# Altium PCB PCB1.PcbDoc
Units mil, origin at the board's own origin, x right, y up, seen from the top; angles counter-clockwise.
Board outline 6000 x 4000 mil, 2 copper layers (Top Layer, Bottom Layer); 43 components, 58 nets, 217 pads, 5 vias.
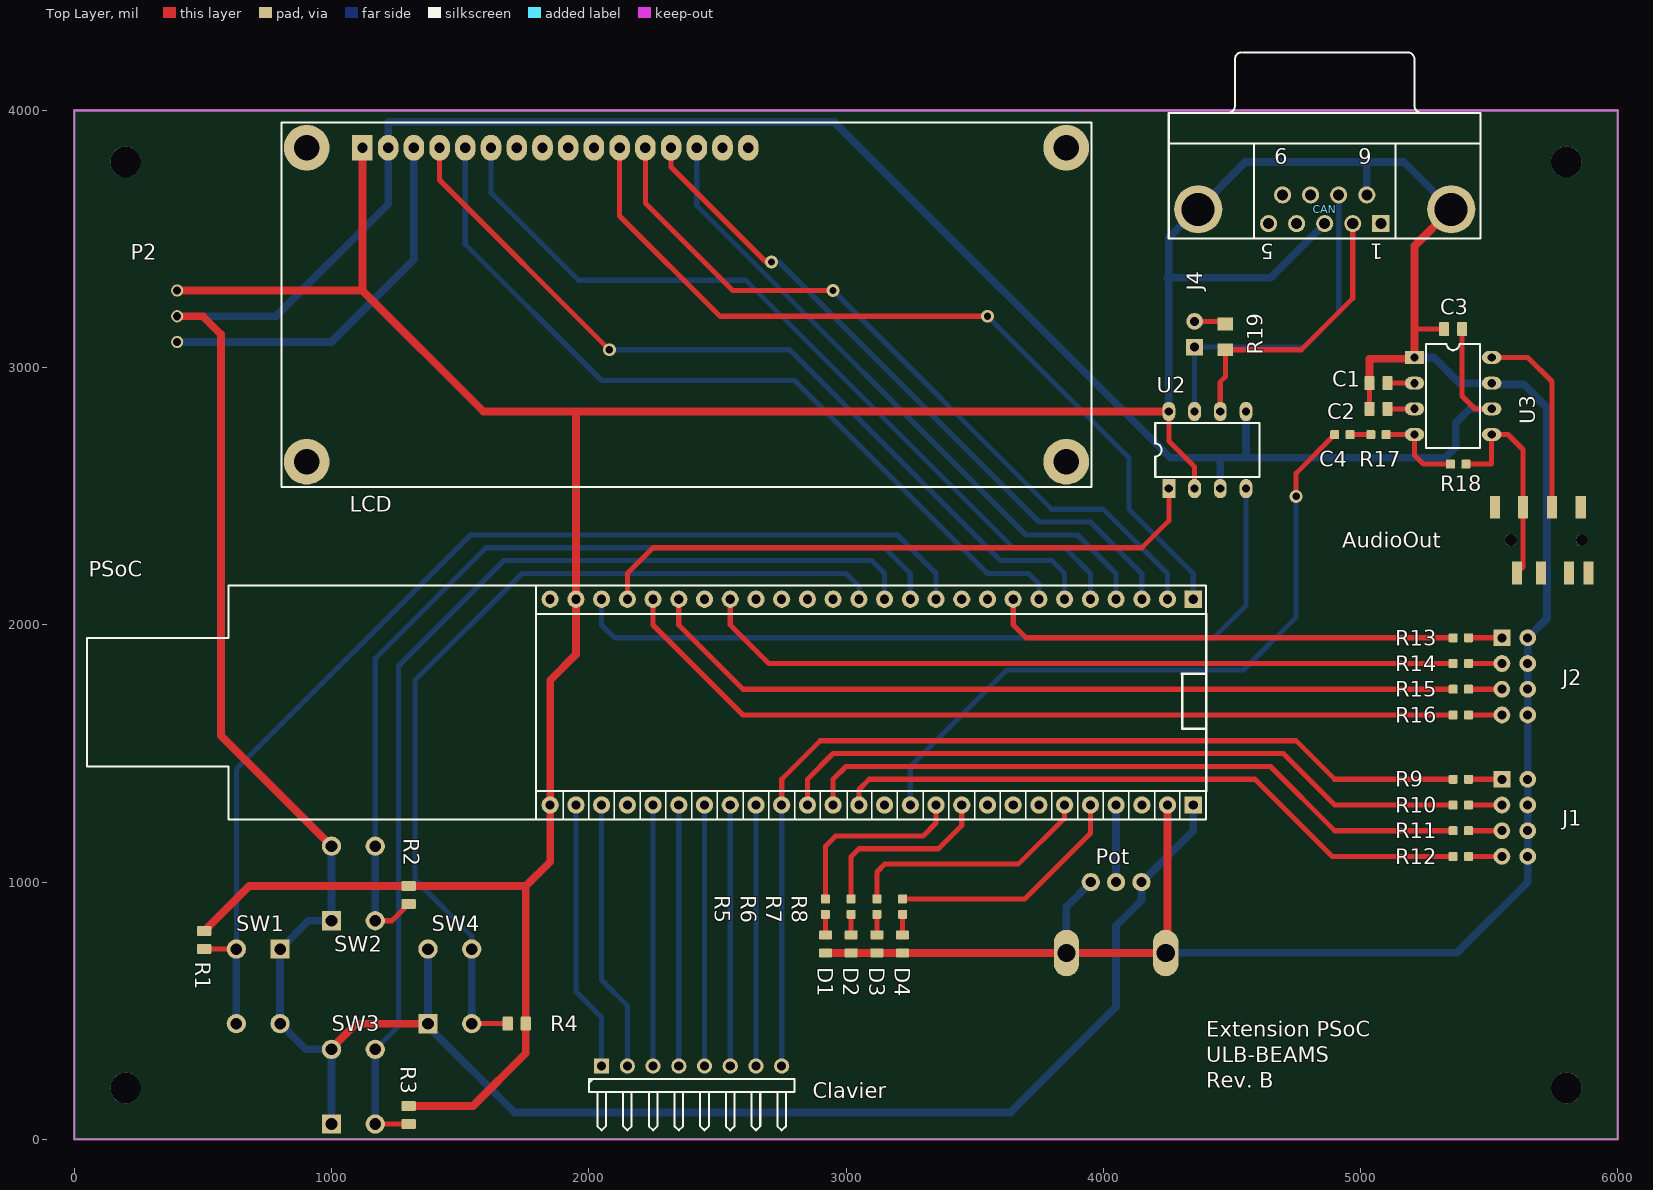
[diagram p0: Top Layer view]
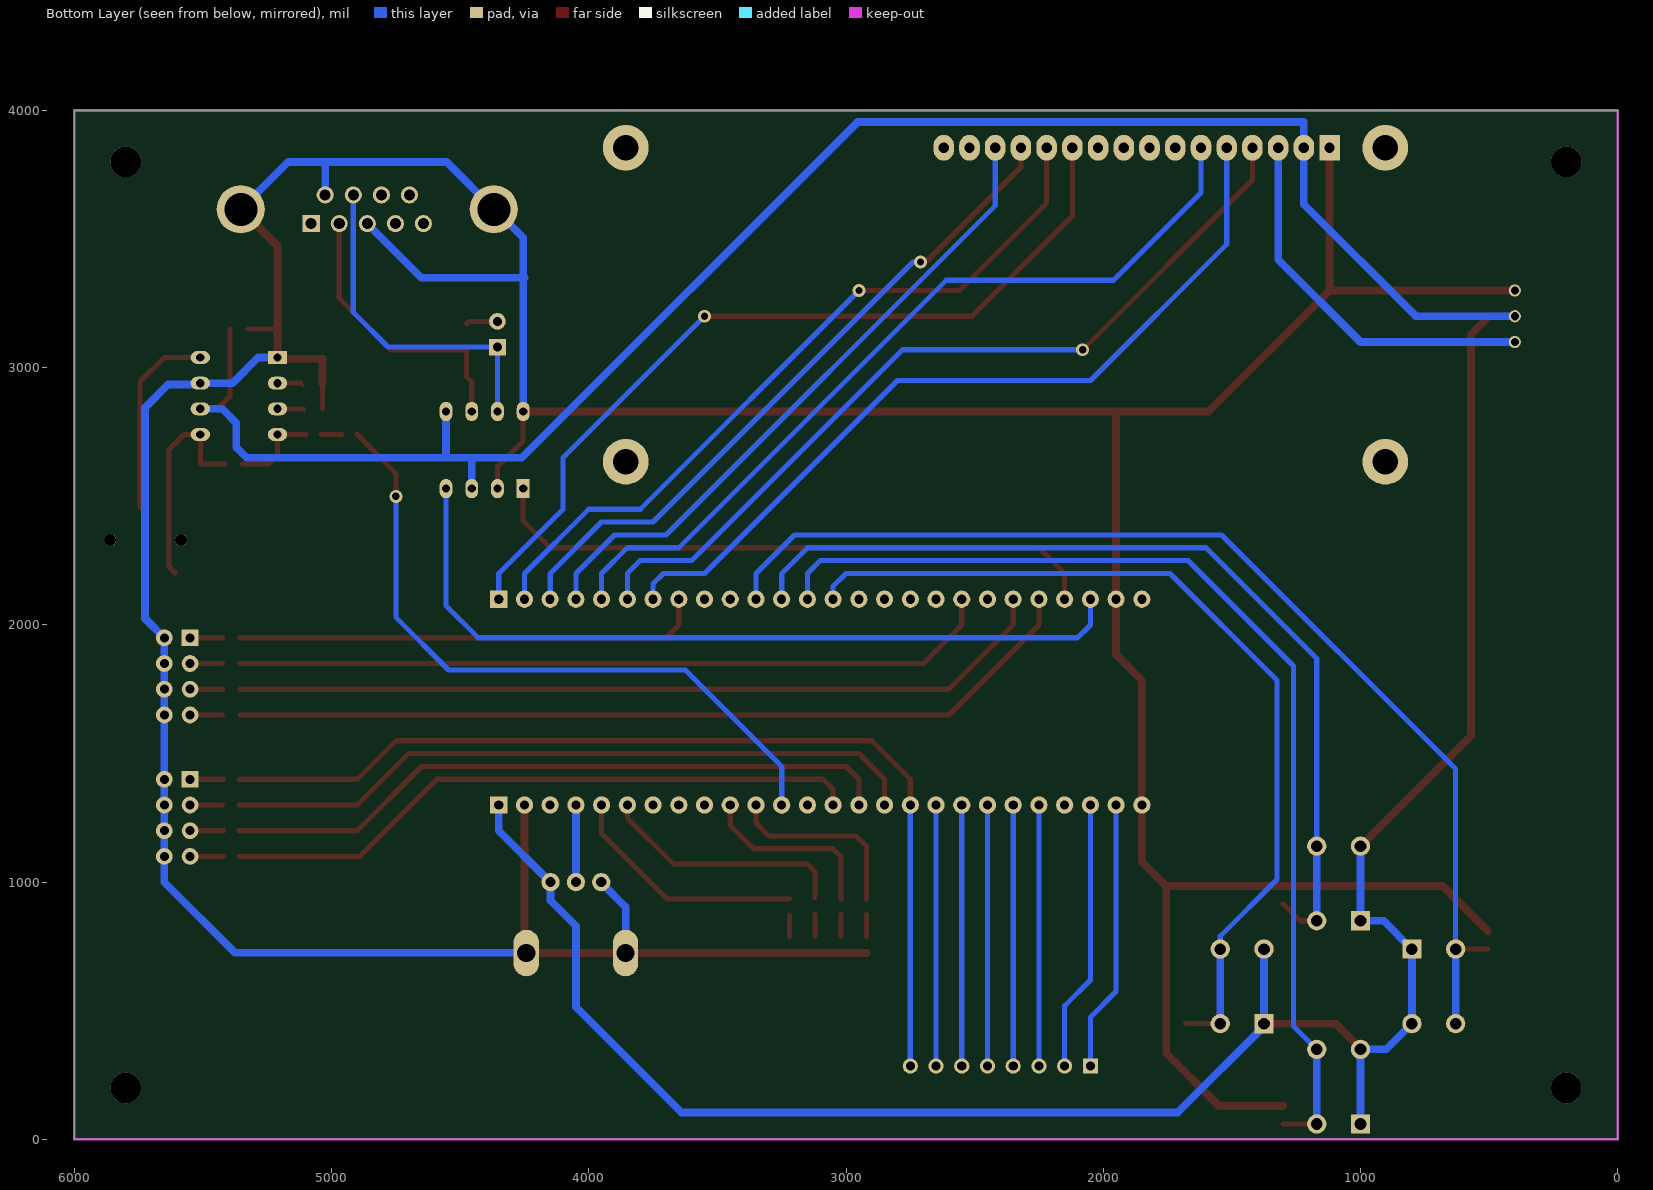
[diagram p1: Bottom Layer view, seen from below]

## Layer stack, top to bottom
Top Solder: solder mask 0.4, Solder Resist, Dk 3.5
Top Layer: signal copper 1.4
Dielectric 1: dielectric 12.6, FR-4, Dk 4.8
Bottom Layer: signal copper 1.4
Bottom Solder: solder mask 0.4, Solder Resist, Dk 3.5

## Board outline
0,0 6000,0 6000,4000 0,4000

## Design rules (kind name [scope] priority, off if disabled: settings)
Clearance [All] p1: gap=10 ignorepadtopadclearanceinfootprint=FALSE except(0: Arc-Hole Track-Hole SMDPad-Hole THPad-Hole Via-Hole Fill-Hole Poly-Hole Region-Hole Text-Hole)
HoleSize [All] p1: absolutevalues=TRUE maxlimit=130 minlimit=1 maxpercent=80.000 minpercent=20.000
PolygonConnect [All] p1: connectstyle=Relief reliefconductorwidth=10 reliefentries=4 polygonreliefangle="90 Angle" airgapwidth=10
RoutingVias [All] p1: holewidth=28 width=50 viastyle="Through Hole" minholewidth=28 minwidth=50 maxholewidth=28 maxwidth=50
SilkToSolderMaskClearance [IsPad] p1: minsilkscreentomaskgap=4 clearancetoexposedcopper=TRUE
SolderMaskExpansion [All] p1: expansion=0
Width [All] p1: maxlimit=100 minlimit=10 preferedwidth=20
28 further rules are at their usual default settings.

## Classes and differential pairs
component class Sheet1: D1 D2 D3 D4 J1 J2 Pot Potentiometer PSoC R1 R2 R3 R4 R5 R6 R7 R8 R9 R10 R11 R12 R13 R14 R15 R16 SW1 SW2 SW3 SW4
component class Sheet2: AudioOut C1 C2 C3 C4 CAN Clavier J3 J4 LCD P2 R17 R18 R19 U2 U3

## Components (designator, comment, footprint, x,y, rotation, side; value= is the part's Value field where it differs from the comment)
AudioOut "320040003" AUDIO8P-SMD-3.5-14.5X6X5MM 6006.26,2330 r180 top
C1 "302010179" C0805 5070,2940 r90 top value=1uF
C2 "302010179" C0805 5070,2840 r90 top value=1uF
C3 "302010179" C0805 5360,3150 r90 top value=1uF
C4 "302010138" C0603 4930,2740 r90 top value=100nF
CAN "LD09P33E4GV00LF" DSUB1.385-2H9B 4860.94,3871.81 r180 top
Clavier "22-05-2081" HDR1X8H 2050,285 r0 top
D1 "304090039" LED-0805 2920,760 r270 top
D2 "304090039" LED-0805 3020,760 r270 top
D3 "304090039" LED-0805 3120,760 r270 top
D4 "304090039" LED-0805 3220,760 r270 top
J1 "320030087" H2X4-2.54 5600,1250 r0 top
J2 "320030087" H2X4-2.54 5600,1800 r0 top
J4 "320190003" H2-2.54 4355,3130 r180 top
LCD "161A-BA-BC" PC161A 1120,3855 r0 top
P2 "301040007" ADJR3-9.5X9.5X10.5MM 400,3200 r270 top
Pot "301040022" ADJR2+3P-11.0X9.8X12.0MM 4050,1000 r270 top
PSoC "CY8CKIT_059" CY8CKIT-059 4350,2100 r270 top
R1 "301010361" R0805 505,775 r0 top value=10k
R2 "301010361" R0805 1300,950 r0 top value=10k
R3 "301010361" R0805 1300,95 r0 top value=10k
R4 "301010361" R0805 1720,450 r270 top value=10k
R5 "301010298" R0603 2920,905 r180 top value=1k
R6 "301010298" R0603 3020,905 r180 top value=1k
R7 "301010298" R0603 3120,905 r180 top value=1k
R8 "301010298" R0603 3220,905 r180 top value=1k
R9 "301010298" R0603 5390,1400 r270 top value=1k
R10 "301010298" R0603 5390,1300 r270 top value=1k
R11 "301010298" R0603 5390,1200 r270 top value=1k
R12 "301010298" R0603 5390,1100 r270 top value=1k
R13 "301010298" R0603 5390,1950 r270 top value=1k
R14 "301010298" R0603 5390,1850 r270 top value=1k
R15 "301010298" R0603 5390,1750 r270 top value=1k
R16 "301010298" R0603 5390,1650 r270 top value=1k
R17 "301010132" R0603 5070,2740 r90 top value=22k
R18 "301010298" R0603 5380,2625 r90 top value=1k
R19 "301010412" R1206 4475,3120 r90 top value=100
SW1 "311020024" SW4-6.0X6.0X5.0MM 715,595 r270 top
SW2 "311020024" SW4-6.0X6.0X5.0MM 1085,995 r90 top
SW3 "311020024" SW4-6.0X6.0X5.0MM 1085,205 r90 top
SW4 "311020024" SW4-6.0X6.0X5.0MM 1460,595 r90 top
U2 "MCP2562-I/P" DIP8 4405,2680 r0 top
U3 "NJM2113D" DIP8 5360,2890 r270 top

## Footprints (in the part's own frame and the unit in brackets; to place one, negate y for a bottom-side part, rotate by r counter-clockwise, add the part's x,y. Pads: shape width x height; smd on the part's side, far side on the other; paste and mask are expansions set on the pad)
ADJR2+3P-11.0X9.8X12.0MM [mm]
  round 1.8 hole 1: 1(0,2.5) 2(0,0) 3(0,-2.5)
  oval 4.6x2.5 hole 1.8: P1(7,4.9) P2(7,-4.9)
ADJR3-9.5X9.5X10.5MM [mil]
  round 47.25 hole 31.5: 1(-100,0) 2(0,0) 3(100,0)
AUDIO8P-SMD-3.5-14.5X6X5MM [mm]
  round 1.2 hole 1.2: 1(3.7,0) 1(10.7,0)
  rect 1x2.25 smd: 1(3.81,-3.24) 2(6.66,-3.24) 3(9.51,-3.24) 4(10.1,3.24) 5(3.05,3.24) 6(4.95,3.24) 7(7.75,3.24) 8(12.26,-3.24)
C0603 [mil]
  rrect25% 35x35 smd: 1(0,30) 2(0,-30)
C0805 [mil]
  rrect25% 55x40 smd: 1(0,35) 2(0,-35)
CY8CKIT-059 [mm] "CYPRESS PSOC5 module"
  rect 1.7x1.7 hole 0.9: 1(0,0) 52(20.32,0)
  round 1.7 hole 0.9: 2(0,-2.54) 3(0,-5.08) 4(0,-7.62) 5(0,-10.16) 6(0,-12.7) 7(0,-15.24) 8(0,-17.78) 9(0,-20.32) 10(0,-22.86) 11(0,-25.4) 12(0,-27.94) 13(0,-30.48) 14(0,-33.02) 15(0,-35.56) 16(0,-38.1) 17(0,-40.64) 18(0,-43.18) 19(0,-45.72) 20(0,-48.26) 21(0,-50.8) 22(0,-53.34) 23(0,-55.88) 24(0,-58.42) 25(0,-60.96) 26(0,-63.5) 27(20.32,-63.5) 28(20.32,-60.96) 29(20.32,-58.42) 30(20.32,-55.88) 31(20.32,-53.34) 32(20.32,-50.8) 33(20.32,-48.26) 34(20.32,-45.72) 35(20.32,-43.18) 36(20.32,-40.64) 37(20.32,-38.1) 38(20.32,-35.56) 39(20.32,-33.02) 40(20.32,-30.48) 41(20.32,-27.94) 42(20.32,-25.4) 43(20.32,-22.86) 44(20.32,-20.32) 45(20.32,-17.78) 46(20.32,-15.24) 47(20.32,-12.7) 48(20.32,-10.16) 49(20.32,-7.62) 50(20.32,-5.08) 51(20.32,-2.54)
  silkscreen extent -1.37,-109.22 21.77,1.27, body extent 19.05,-64.9 21.59,1.27, height 8.38
DIP8 [mil] "DIP, Plastic; 8 Leads; Row Spacing 7.62 mm; Pitch 2.54 mm"
  rect 50x75 hole 32: 1(-150,-150)
  oval 50x75 hole 32: 2(-50,-150) 3(50,-150) 4(150,-150) 5(150,150) 6(50,150) 7(-50,150) 8(-150,150)
  silkscreen extent -203,-104 203,104
DSUB1.385-2H9B [mm] "Connector; D Subminiature AMPLIMITE 2000; 9 Position; Right Angle"
  rect 1.69x1.69 hole 1.09: 1(-5.54,7.92)
  round 1.69 hole 1.09: 2(-2.77,7.92) 3(0,7.92) 4(2.77,7.92) 5(5.54,7.92) 6(-4.155,5.08) 7(-1.385,5.08) 8(1.385,5.08) 9(4.155,5.08)
  round 4.76 hole 3.26: 10(12.495,6.5) 11(-12.495,6.5)
  silkscreen extent -15.4,-9 15.4,9.4, body extent -15.4,-9 15.4,9.4, height 12.93
H2-2.54 [mil]
  rect 65x65 hole 35: 1(0,50)
  round 65 hole 35: 2(0,-50)
H2X4-2.54 [mil]
  rect 65x65 hole 35: 1(-50,150)
  round 65 hole 35: 2(-50,50) 3(-50,-50) 4(-50,-150) 5(50,-150) 6(50,-50) 7(50,50) 8(50,150)
HDR1X8H [mm] "Connector; Header; 8 Position; Right Angle"
  rect 1.5x1.5 hole 0.9: 1(0,0)
  round 1.5 hole 0.9: 2(2.54,0) 3(5.08,0) 4(7.62,0) 5(10.16,0) 6(12.7,0) 7(15.24,0) 8(17.78,0)
  silkscreen extent -1.27,-6.35 19.05,-1.27
LED-0805 [mil]
  rrect25% 35x50 smd: +(-35,0) -(35,0)
PC161A [mil] "16x1 LCD module"
  round 177.17 hole 98.43: 0(-216.54,-1220.47) 0(-216.54,0) 0(2736.22,-1220.47) 0(2736.22,0)
  rect 80x100 hole 40: 1(0,0)
  oval 80x100 hole 40: 2(100,0) 3(200,0) 4(300,0) 5(400,0) 6(500,0) 7(600,0) 8(700,0) 9(800,0) 10(900,0) 11(1000,0) 12(1100,0) 13(1200,0) 14(1300,0) 15(1400,0) 16(1500,0)
  silkscreen extent -315,-1319 2835,98
R0603 [mil]
  rrect25% 35x35 smd: 1(0,30) 2(0,-30)
R0805 [mil]
  rrect25% 55x40 smd: 1(0,35) 2(0,-35)
R1206 [mil]
  rect 50x60 smd: 1(-50,0) 2(50,0)
SW4-6.0X6.0X5.0MM [mil]
  rect 75x75 hole 45: 1(-145,85)
  round 75 hole 45: 2(-145,-85) 3(145,-85) 4(145,85)

## Part data
AudioOut: library part AUDIO-JACK-SMD-8P(PJ-3536-L6S), MPN=PJ-3536-L6S
C1 C2 C3: library part CERAMIC-1UF-25V-10%-X7R(0805), MPN=CC0805KKX7R8BB105
C4: library part CERAMIC-100NF-50V-10%-X7R(0603), MPN=CC0603KRX7R9BB104
CAN: library part "D Connector 9", "Receptacle Assembly, 9 Position, Right Angle", PackageDocument=O, Supplier Part Number 1=1372559, DatasheetDocument=1-Sep-1999, Gender=Receptacle, LatestRevisionDate=17-Jul-2002, LatestRevisionNote="Re-released for DXP Platform.", Orientation="Right Angle", PackageReference=788750, Positions=9, Published=15-Jun-2001, Publisher="Altium Limited", Supplier 1=RSComponents
Clavier: library part "Header 8H", "Header, 8-Pin, Right Angle", Supplier Part Number 1=479-030, LatestRevisionDate=17-Jul-2002, LatestRevisionNote="Re-released for DXP Platform.", Publisher="Altium Limited", Supplier 1=RSComponents
D1 D2 D3 D4: library part SMD-LED-CLEAR-YELLOW(0805), MPN=17-215UYC/S530-A3/TR8
J1 J2: library part DIP-BLACK-FEMALE-HEADER(2X4P-2.54)
J4: library part DIP-BLACK-JUMPER
LCD: library part PC161A, "Displaytech 16x1 LCD monochrome display", Supplier Part Number 1=5326335, Supplier 1=RSComponents
P2: library part DIP-VR-TOP-ADJ-10K(3P-9.5X9.5X5MM), MPN=3386U-103
Pot: library part DIP-VR-TOP-ADJ-10K(3+2P-11.0X9.8X12.0MM), MPN=WH09-2-103
PSoC: library part CY8CKIT-059, LatestRevisionDate=29-May-2009, Published=24-Mar-1999, Publisher="Altium Limited"
R1 R2 R3 R4: library part SMD-RES-10K-1%-1/8W(0805), MPN=RC0805FR-0710KL
R5 R6 R7 R8 R9 R10 R11 R12 R13 R14 R15 R16 R18: library part SMD-RES-1K-1%-1/10W(0603), MPN=RC0603FR-071KL
R17: library part SMD-RES-22K-5%-1/10W(0603), MPN=RC0603JR-0722KL
R19: library part SMD-RES-100R-5%-1/4W(1206), MPN=RC1206JR-07100RL
SW1 SW2 SW3 SW4: library part DIP-SWITCH-TACTILE-SPST-NO/TS-1109(4P-D6.0MM)'TS-1109'
U2: "High-Speed CAN Transceiver, 8-Pin PDIP", Manufacturer=Microchip, PartNumber=MCP2551-I/P, Supplier Part Number 1=MCP2551-I/P-ND, Code_JEDEC=MS-001, ComponentLink1Description="Manufacturer URL", ComponentLink1URL=http://www.microchip.com/, ComponentLink2Description=Datasheet, ComponentLink2URL=http://ww1.microchip.com/downloads/en/DeviceDoc/21667F.pdf, ComponentLink3Description="Package Specification", ComponentLink3URL=http://www.microchip.com/stellent/groups/techpub_sg/documents/packagingspec/en012702.pdf, DatasheetVersion="revF, Jul-2010", Mounting Technology="Through Hole", PackageDescription="8-Lead Plastic Dual In-Line (P) - 300 mil Body [PDIP]", PackageReference=PDIP300-P8, PackageVersion="revBB, Aug-2009", Supplier 1=Digi-Key, Supplier 2=Farnell, Supplier 3=Newark, Supplier 4=Mouser, Supplier Part Number 2=1292240, Supplier Part Number 3=61K2947, Supplier Part Number 4=579-MCP2551-I/P

## Free pads (board coordinates)
  round 120 hole 120: 1(200,200) 1(200,3800) 1(5800,200) 1(5800,3800)

## Via types
v1: diameter 50, hole 28, Top Layer to Bottom Layer, 5 vias

## Nets (pads, with @x,y where several pads share a name; then routed paths per layer and width w, separated by ;. In a path a pad name is that pad's centre, name@x,y a point inside that pad or via, vN(x,y) a via of type N, cw(c..) or ccw(c..) an arc to the next point about the centre after c; other vN are vias at no path point)
5V: C3.2 LCD.2 P2.2 Pot.1 PSoC.52 SW1.1 SW1.4 SW2.1 SW2.4 SW3.1 SW3.4 SW4.1 SW4.4 U2.3 U2.5 U3.6 | length 15340.8
  Top Layer w10: SW3.4 SW3.4@1000,355
  Top Layer w20: C3.2 5395,2890 5445,2840 U3.6
  Top Layer w30: P2.2 500,3200 570,3130 570,1570 SW2.4 ; SW3.4@1000,355 1095,450 SW4.1
  Bottom Layer w10: SW4.1@1375,440 SW4.1 ; Pot.1@4150,1001.11 Pot.1@4150.52,1000.59
  Bottom Layer w30: P2.2 784.09,3200 1220,3635.91 LCD.2 1220,3955 2955,3955 4260,2650 4455,2650 ; SW3.1 SW3.4 900,350 SW1.4 SW1.1 910,850 SW2.1 SW2.4 ; SW4.1@1375,440 1710,105 3640,105 4050,515 4050,830 4148.43,928.43 Pot.1 ; SW4.1 SW4.4 ; Pot.1@4150.52,980.59 4150.52,1000.59 4350,1200.07 PSoC.52 PSoC.52@4350,1305 ; U2.3 4455,2650 ; U2.5 4555,2650 ; U3.6 5425,2840 5370,2785 5370,2690 5330,2650 4555,2650 ; 4455,2650 4555,2650
CAN_Rx: PSoC.24 U2.4 | length 3132.5
  Bottom Layer w20: PSoC.24 2050,2000 2100,1950 4430,1950 4555,2075 U2.4
CAN_Tx: PSoC.23 U2.1 | length 2422
  Top Layer w20: PSoC.23 2150,2200 2250,2300 4150,2300 4255,2405 U2.1
  Bottom Layer w10: U2.1 U2.1@4260,2535
D4: LCD.11 PSoC.1 | length 3287.9
  Top Layer w20: LCD.11 2120,3590 2510,3200 v1(3550,3200)
  Bottom Layer w20: v1(3550,3200) 4100,2650 4100,2450 4350,2200 PSoC.1
D5: LCD.12 PSoC.2 | length 2941.5
  Top Layer w20: LCD.12 2220,3640 2560,3300 v1(2950,3300)
  Bottom Layer w20: v1(2950,3300) 3800,2450 4000,2450 4250,2200 PSoC.2
D6: LCD.13 PSoC.3 | length 2659.5
  Top Layer w20: LCD.13 2320,3780 2689.07,3410.93 v1(2710.93,3410.93)
  Bottom Layer w20: v1(2710.93,3410.93) 2739.07,3410.93 3750,2400 3950,2400 4150,2200 PSoC.3
D7: LCD.14 PSoC.4 | length 2554.4
  Top Layer w10: LCD.14 LCD.14@2425,3850
  Bottom Layer w20: LCD.14 2420,3630 3700,2350 3900,2350 4050,2200 PSoC.4
DAC_OUT: C4.1 PSoC.41 | length 2682.4
  Top Layer w20: v1(4750,2500) 4750,2590 C4.1
  Bottom Layer w20: PSoC.41@3250,1275 PSoC.41 3250,1450 3625,1825 ; 3630,1825 4545,1825 4750,2030 v1(4750,2500)
E: LCD.6 PSoC.5 | length 3218
  Bottom Layer w20: LCD.6 1620,3680 1960,3340 2610,3340 3650,2300 3850,2300 3950,2200 PSoC.5
GND: C1.1 C2.1 C3.1 CAN.3 CAN.6 CAN.10 CAN.11 D1.- D2.- D3.- D4.- J1.5 J1.6 J1.7 J1.8 J2.5 J2.6 J2.7 J2.8 LCD.1 P2.1 Pot.3 Pot.P1 Pot.P2 PSoC.25 PSoC.27 PSoC.51 R1.1 R2.1 R3.1 R4.1 U2.2 U2.8 U3.1 U3.7 | length 19494.1
  Top Layer w10: U3.1@5205,3035 U3.1 ; 5210,3150 5210,3155
  Top Layer w20: U2.8 4255,2715 4355,2615 U2.2 ; C2.1 C1.1 ; 5210,3150 C3.1
  Top Layer w30: P2.1 1120,3300 ; R1.1 680,985 R2.1 1755,985 1850,1080 PSoC.27 1850,1785 1950,1885 PSoC.25@1950,2075 ; LCD.1@1120,3845 1120,3300 ; R3.1 1550,130 1755,335 R4.1 1755,980 ; PSoC.25 1950,2820 1940,2830 ; D1.-@2920,724.41 3220,724.41 Pot.P2 ; Pot.P2@3856.5,725 Pot.P1@4235,725 ; Pot.P1 4250,731.5 PSoC.51 ; U2.8 1940,2830 ; C1.1 5035,3035 U3.1@5205,3035 ; U3.1 5210,3150 ; 5210,3155 5210,3473.03 CAN.11 ; 1120,3300 1590,2830 1940,2830
  Bottom Layer w10: U3.7 U3.7@5515,2935
  Bottom Layer w30: Pot.P2@3856.5,725 3856.22,725.28 3856.22,903.15 Pot.3@3952.32,999.25 ; Pot.P1@4235,725 4240,730 Pot.P1@4250,730 ; Pot.P1@4245,705 4265.28,725.28 5375.28,725.28 5650,1000 J1.5 J1.6 J1.7 J1.8 J2.5 J2.6 J2.7 J2.8 5725,2025 ; 4250,3350 4255,3350 ; U2.8 4255,3350 ; CAN.3 4650.94,3350 4255,3350 ; CAN.6 5024.53,3794.53 5030,3800 ; U3.1 5285,3040 5385,2940 U3.7 ; CAN.11 5168.78,3800 5030,3800 ; U3.7@5515,2935 5635,2935 5725,2845 5725,2030 ; 4255,3350 4255,3505 4369.02,3619.02 CAN.10 4553.11,3800 5030,3800
LED1: PSoC.42 R5.2 | length 742.3
  Top Layer w20: R5.2 2920,1140 2960,1180 3300,1180 3350,1230 PSoC.42
LED2: PSoC.43 R6.2 | length 724.7
  Top Layer w20: R6.2 3020,1100 3050,1130 3360,1130 3450,1220 PSoC.43
LED3: PSoC.47 R7.2 | length 967
  Top Layer w20: R7.2@3120,940 3120,1040 3150,1070 3670,1070 3850,1250 PSoC.47
LED4: PSoC.48 R8.2 | length 945.6
  Top Layer w20: R8.2 3695,935 3950,1190 PSoC.48
LINE1: Clavier.1 PSoC.28 | length 1031.4
  Bottom Layer w20: PSoC.28@1950,1275 1950,575 2050,475 Clavier.1
LINE2: Clavier.2 PSoC.29 | length 1031.4
  Bottom Layer w20: PSoC.29@2050,1275 2050,620 2150,520 Clavier.2
LINE3: Clavier.3 PSoC.31 | length 1015
  Bottom Layer w20: Clavier.3 PSoC.31
LINE4: Clavier.4 PSoC.32 | length 1015
  Bottom Layer w20: Clavier.4 PSoC.32
NetAudioOut_2: AudioOut.2 U3.8 | length 761.4
  Top Layer w20: U3.8 5650,3040 5744.06,2945.94 AudioOut.2
NetAudioOut_3: AudioOut.3 AudioOut.4 R18.2 U3.5 | length 845
  Top Layer w20: R18.2@5415,2625 5510,2625 U3.5 5573.7,2740 5631.85,2681.85 AudioOut.3 5631.85,2225.67 AudioOut.4
NetC1_2: C1.2 U3.2 | length 104.1
  Top Layer w10: C1.2@5110,2930 C1.2@5120,2940
  Top Layer w20: C1.2@5120,2940 U3.2
NetC2_2: C2.2 U3.3 | length 107.1
  Top Layer w10: C2.2@5105,2835 C2.2@5110,2840
  Top Layer w20: C2.2@5110,2840 U3.3
NetC4_2: C4.2 R17.1 | length 87.1
  Top Layer w10: R17.1@5035,2735 R17.1
  Top Layer w20: C4.2 R17.1
NetCAN_2: CAN.2 R19.1 U2.6 | length 1111.1
  Top Layer w20: U2.6 4455,2945 4475,2965 R19.1 ; R19.1@4480,3070 4770,3070 4970,3270 CAN.2
NetCAN_7: CAN.7 J4.1 U2.7 | length 1322.9
  Bottom Layer w20: U2.7 J4.1 4780,3080 4915.47,3215.47 CAN.7
NetD1_+: D1.+ R5.1 | length 85
  Top Layer w20: D1.+@2920,790 D1.+ R5.1
NetD2_+: D2.+ R6.1 | length 85
  Top Layer w20: D2.+@3020,790 D2.+ R6.1
NetD3_+: D3.+ R7.1 | length 85
  Top Layer w20: D3.+@3120,790 D3.+ R7.1
NetD4_+: D4.+ R8.1 | length 80
  Top Layer w20: D4.+@3220,790 R8.1@3220,870
NetJ1_1: J1.1 R9.1 | length 130
  Top Layer w20: R9.1 J1.1
NetJ1_2: J1.2 R10.1 | length 125
  Top Layer w20: R10.1@5425,1300 J1.2
NetJ1_3: J1.3 R11.1 | length 130
  Top Layer w20: R11.1 J1.3
NetJ1_4: J1.4 R12.1 | length 130
  Top Layer w20: R12.1 J1.4
NetJ2_1: J2.1 R13.1 | length 125
  Top Layer w20: R13.1@5425,1950 J2.1
NetJ2_2: J2.2 R14.1 | length 125
  Top Layer w20: R14.1@5425,1850 J2.2
NetJ2_3: J2.3 R15.1 | length 125
  Top Layer w20: R15.1@5425,1750 J2.3
NetJ2_4: J2.4 R16.1 | length 125
  Top Layer w20: R16.1@5425,1650 J2.4
NetJ4_2: J4.2 R19.2 | length 124.1
  Top Layer w20: J4.2 4465,3180 R19.2
NetLCD_3: LCD.3 P2.3 | length 1487.5
  Bottom Layer w30: P2.3 1000,3100 1320,3420 LCD.3
NetPot_2: Pot.2 PSoC.49 | length 300
  Bottom Layer w30: Pot.2 PSoC.49
NetR17_2: R17.2 R18.1 U3.4 | length 339.5
  Top Layer w20: R17.2 U3.4 5210,2660 5245,2625 R18.1@5345,2625
P1.2: PSoC.19 R14.2 | length 2967.1
  Top Layer w20: PSoC.19 2550,2000 2700,1850 R14.2@5355,1850
P1.4: PSoC.21 R15.2 | length 3208.6
  Top Layer w20: PSoC.21 2350,2000 2600,1750 R15.2@5355,1750
P1.5: PSoC.22 R16.2 | length 3350
  Top Layer w20: PSoC.22 2250,2000 2600,1650 R16.2@5355,1650
P2.7: PSoC.8 R13.2 | length 1825.7
  Top Layer w20: PSoC.8 3650,2000 3700,1950 R13.2@5355,1950
P15.0: Clavier.8 PSoC.36 R9.2 | length 3849.3
  Top Layer w20: PSoC.36 2750,1400 2900,1550 4750,1550 4900,1400 R9.2
  Bottom Layer w20: Clavier.8 PSoC.36
P15.1: PSoC.37 R10.2 | length 2734.3
  Top Layer w20: PSoC.37 2850,1400 2950,1500 4700,1500 4900,1300 R10.2
P15.2: PSoC.38 R11.2 | length 2634.3
  Top Layer w20: PSoC.38 2950,1400 3000,1450 4650,1450 4900,1200 R11.2
P15.3: PSoC.39 R12.2 | length 2510.8
  Top Layer w20: PSoC.39 3050,1360 3090,1400 4590,1400 4890,1100 R12.2
R/W: LCD.5 PSoC.7 | length 3211.8
  Bottom Layer w20: LCD.5 1520,3480 2050,2950 2800,2950 3550,2200 3710,2200 3750,2160 PSoC.7
ROW1: Clavier.5 PSoC.33 | length 1015
  Bottom Layer w20: Clavier.5 PSoC.33
ROW2: Clavier.6 PSoC.34 | length 1015
  Bottom Layer w20: Clavier.6 PSoC.34
ROW3: Clavier.7 PSoC.35 | length 1015
  Bottom Layer w20: Clavier.7 PSoC.35
RS: LCD.4 PSoC.6 | length 3288.7
  Top Layer w20: LCD.4 1420,3730 v1(2080,3070)
  Bottom Layer w20: v1(2080,3070) 2780,3070 3600,2250 3800,2250 3850,2200 PSoC.6
SW1: PSoC.11 R1.2 SW1.2 SW1.3 | length 4374.1
  Top Layer w20: R1.2 SW1.2
  Bottom Layer w20: SW1.2 630,1440 1540,2350 3200,2350 3350,2200 PSoC.11
  Bottom Layer w30: SW1.3 SW1.2
SW2: PSoC.12 R2.2 SW2.2 SW2.3 | length 3576.5
  Top Layer w20: SW2.2 1235,850 R2.2
  Bottom Layer w20: SW2.3 1170,1870 1600,2300 3150,2300 3250,2200 PSoC.12
  Bottom Layer w30: SW2.2 SW2.3
SW3: PSoC.13 R3.2 SW3.2 SW3.3 | length 4127.8
  Top Layer w20: SW3.2 R3.2
  Bottom Layer w20: SW3.3 1260,440 1260,1840 1670,2250 3100,2250 3150,2200 PSoC.13
  Bottom Layer w30: SW3.2 SW3.3
SW4: PSoC.14 R4.2 SW4.2 SW4.3 | length 3528.7
  Top Layer w20: SW4.2 R4.2@1680,450
  Bottom Layer w20: SW4.3 1545,790 1325,1010 1325,1785 1740,2200 3000,2200 3050,2150 PSoC.14
  Bottom Layer w30: SW4.2 SW4.3
pads on no net: AudioOut.1 AudioOut.5 AudioOut.6 AudioOut.7 AudioOut.8 CAN.1 CAN.4 CAN.5 CAN.8 CAN.9 LCD.0 LCD.7 LCD.8 LCD.9 LCD.10 LCD.15 LCD.16 PSoC.9 PSoC.10 PSoC.15 PSoC.16 PSoC.17 PSoC.18 PSoC.20 PSoC.26 PSoC.30 PSoC.40 PSoC.44 PSoC.45 PSoC.46 PSoC.50

## Keep-outs
Keep-Out Layer:
  the board outline again, w10

## Silkscreen, mask and mechanical layers (free items; w line width, h text height)
Top Overlay:
  text "Extension PSoC" at 4400,400 h60
  text "ULB-BEAMS" at 4400,300 h60
  text "Rev. B" at 4400,200 h60
Mechanical 1:
  the board outline again, w10

## Text inside footprints (layer, text, board x,y; h text height)
CAN: Top Overlay "9" at 4717.05,3852.91 h59.06 r180; Top Overlay "5" at 4662.52,3482.83 h59.06 r180; Top Overlay "1" at 5088.9,3482.83 h59.06 r180; Top Overlay "6" at 5044.21,3852.91 h59.06 r180